# Altium PCB V2_PCB_interplaque_PixhawkPcbDoc.PcbDoc
Units mm, origin at the board's own origin, x right, y up, seen from the top; angles counter-clockwise.
Board outline 48 x 28.5 mm, 2 copper layers (Top Layer, Bottom Layer); 16 components, 46 nets, 128 pads, 46 vias.
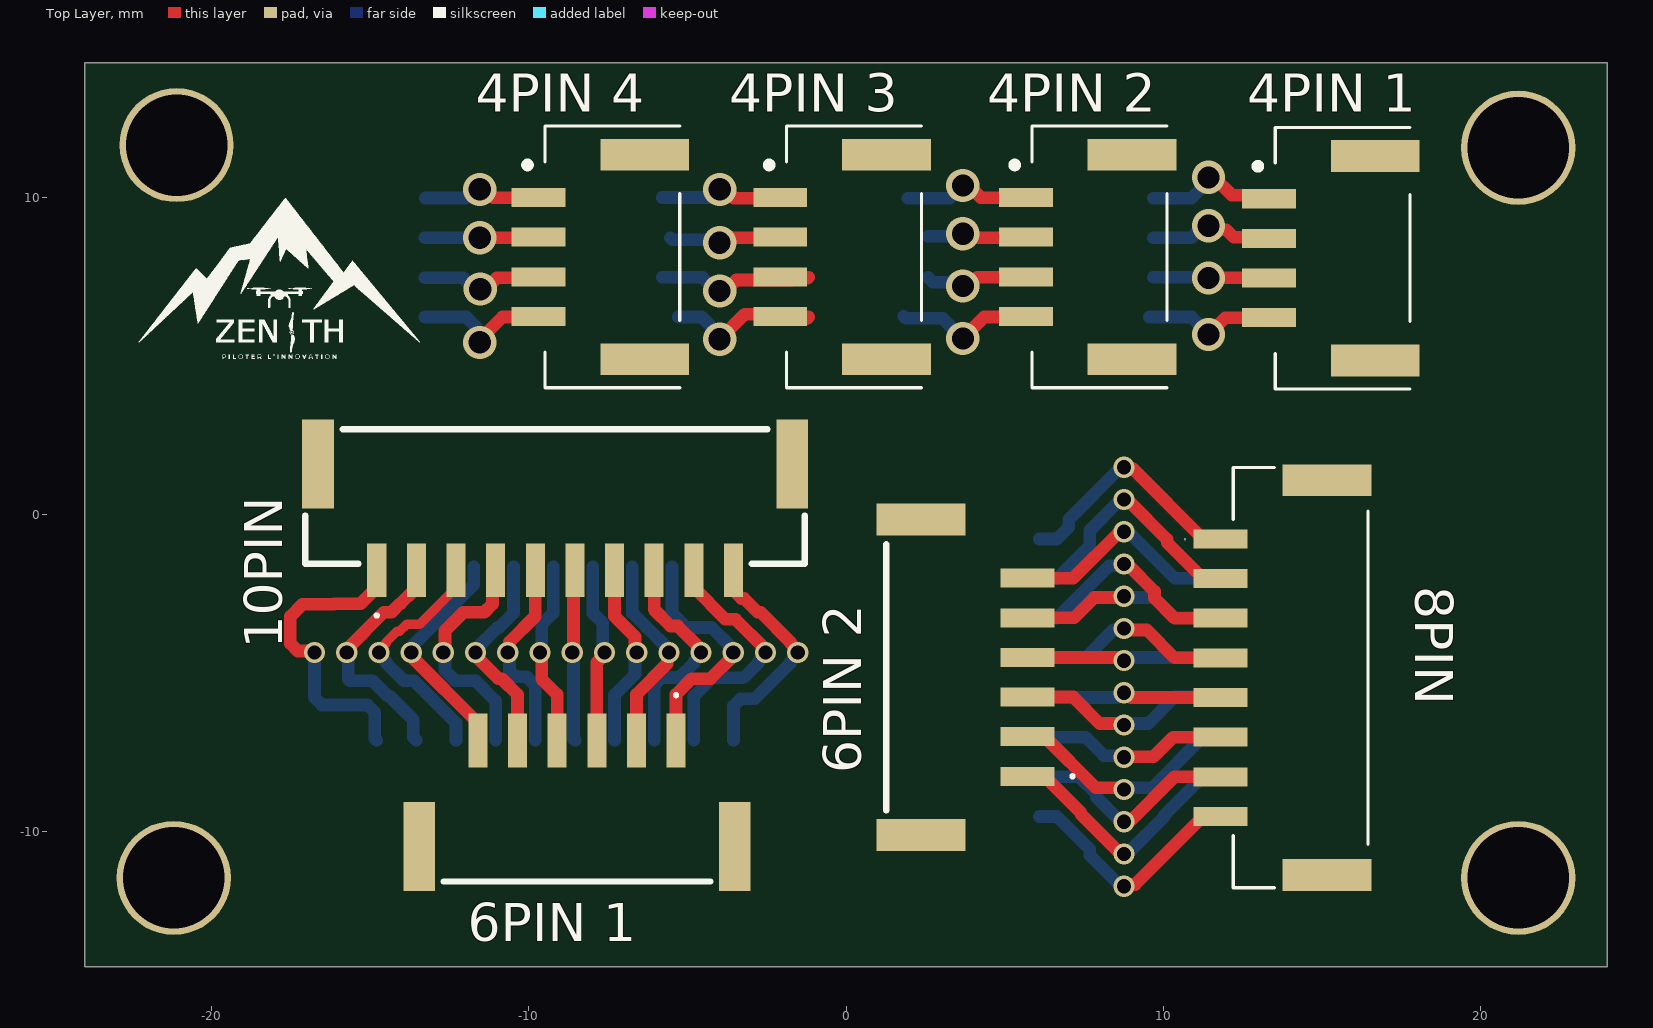
[diagram p0: Top Layer view]
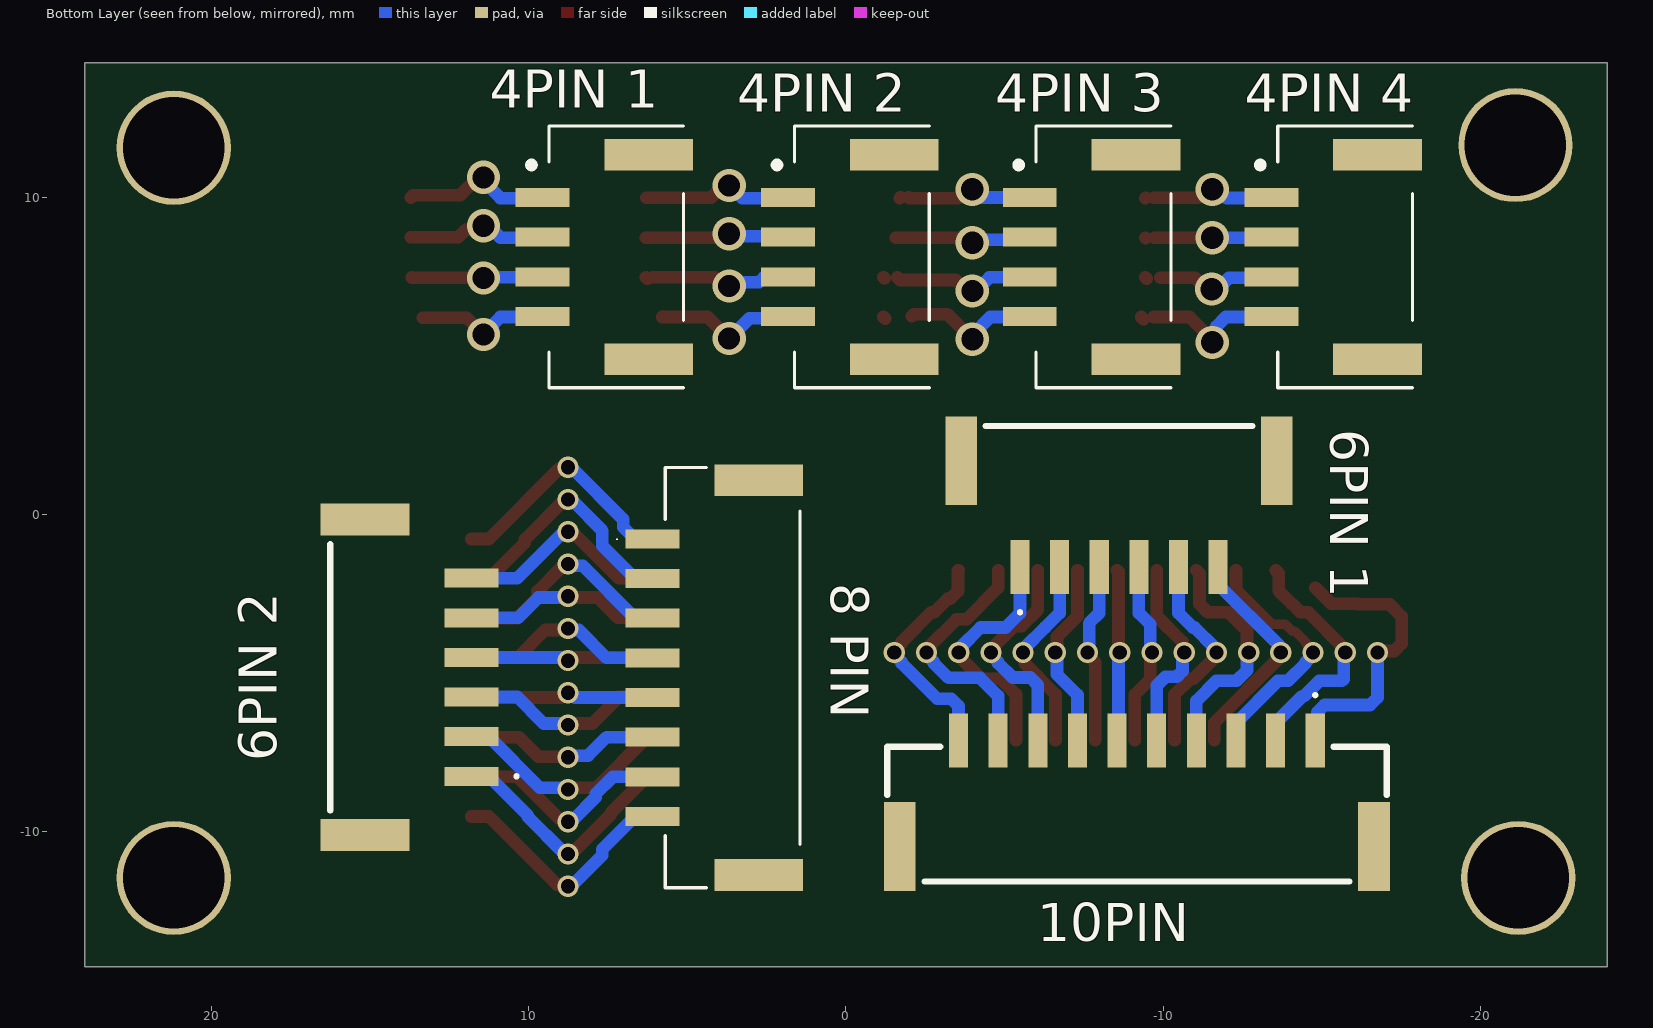
[diagram p1: Bottom Layer view, seen from below]
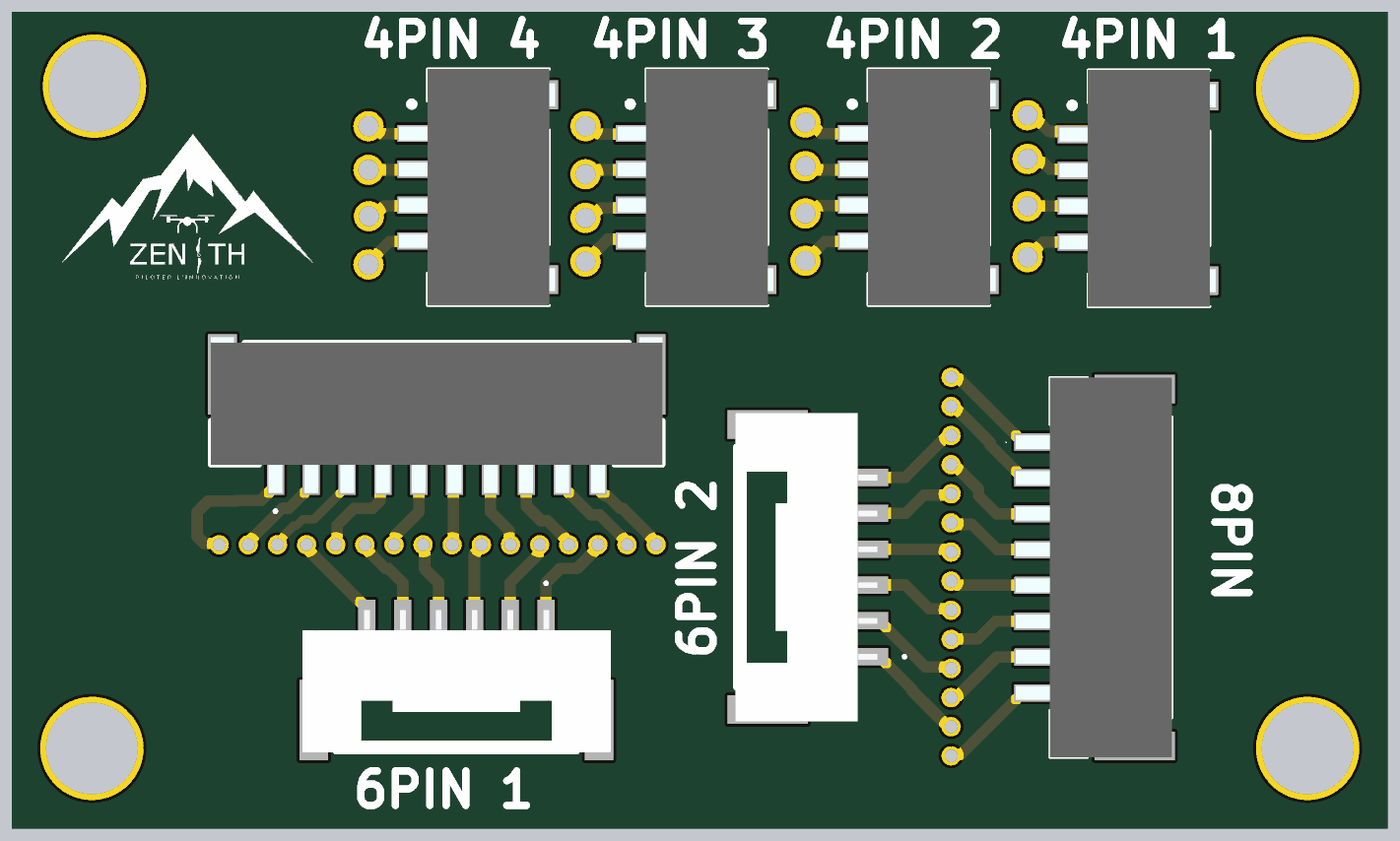
[diagram p2: 3D render of the assembled board from above, using the file's embedded part models]
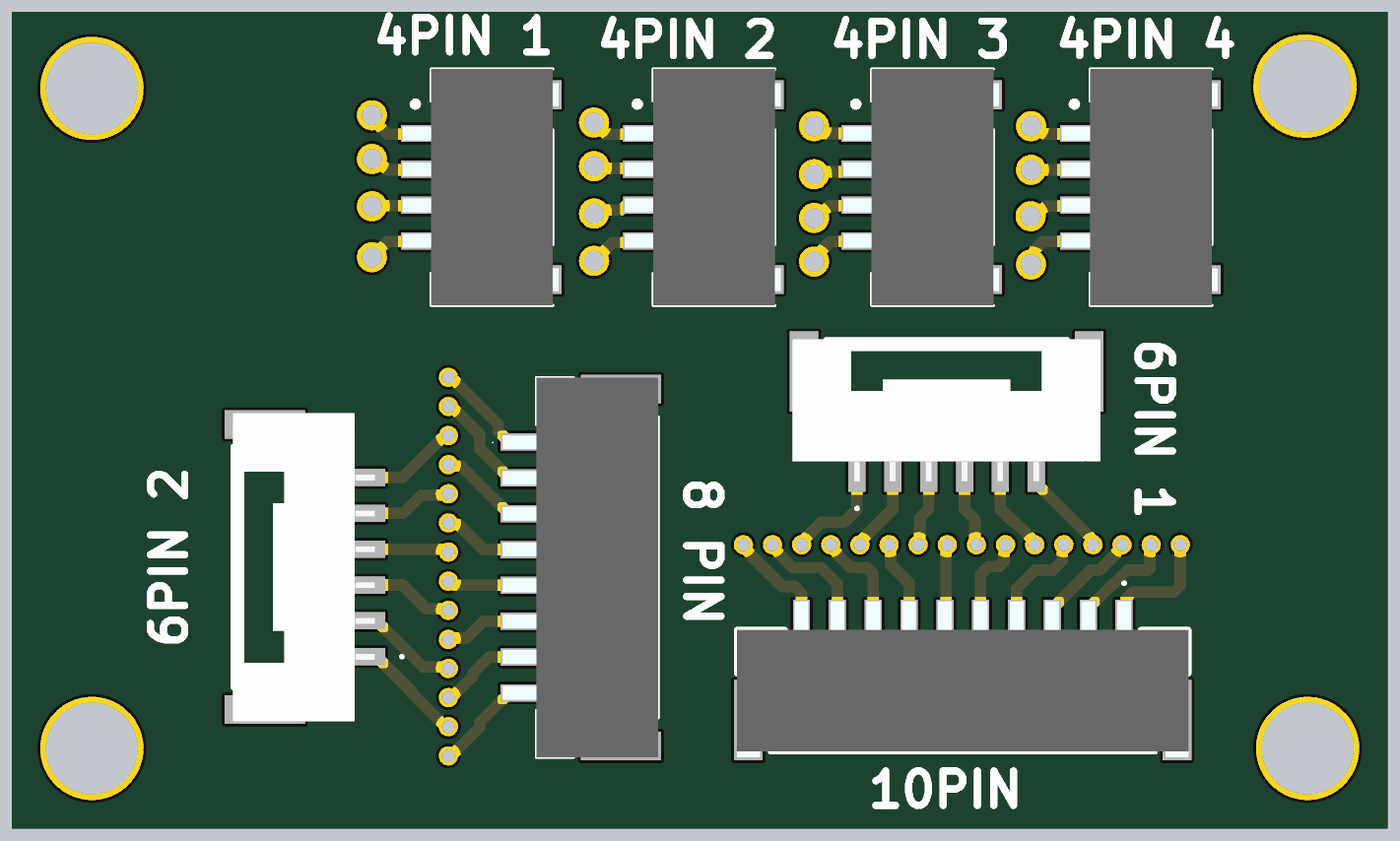
[diagram p3: 3D render of the assembled board from below, using the file's embedded part models]

## Layer stack, top to bottom
Top Solder: solder mask 0.0102, Solder Resist, Dk 3.5
Top Layer: signal copper 0.0356
Dielectric 1: dielectric 0.32, FR-4, Dk 4.8
Bottom Layer: signal copper 0.0356
Bottom Solder: solder mask 0.0102, Solder Resist, Dk 3.5

## Board outline
-24,-14.25 -24,14.25 24,14.25 24,-14.25

## Design rules (kind name [scope] priority, off if disabled: settings)
AssemblyTestpoint [All] p1: testpointundercomponent=TRUE minsize=1.016 maxsize=2.54 preferedsize=1.524 minholesize=0 maxholesize=1.016 preferedholesize=0.813 testpointgrid=0.025 usegrid=TRUE gridoriginx=43.812 gridoriginy=28.283 gridtolerance=0 allowsidetop=TRUE allowsidebottom=TRUE
Clearance [All] p1: gap=0.254 ignorepadtopadclearanceinfootprint=FALSE
FabricationTestpoint [All] p1: side=3 testpointundercomponent=TRUE minsize=1.016 maxsize=2.54 preferedsize=1.524 minholesize=0 maxholesize=1.016 preferedholesize=0.813 testpointgrid=0.025 allowsidetop=TRUE allowsidebottom=TRUE usegrid=TRUE gridoriginx=43.812 gridoriginy=28.283 gridtolerance=0
PolygonConnect [All] p1: connectstyle=Relief reliefconductorwidth=0.254 reliefentries=4 polygonreliefangle="90 Angle" airgapwidth=0.254
RoutingVias [All] p1: holewidth=0.711 width=1.27 viastyle="Through Hole" minholewidth=0.711 minwidth=1.27 maxholewidth=0.711 maxwidth=1.27 useviatemplates=TRUE
SolderMaskExpansion [All] p1: expansion=0.102 istentingtop=FALSE
Width [All] p1: maxlimit=0.5 minlimit=0.3 preferedwidth=0.4
28 further rules are at their usual default settings.

## Classes and differential pairs
component class V2_PCB_interplaque: "4PIN 1" "4PIN 2" "4PIN 3" "4PIN 4" "6PIN 1" "6PIN 2" "8 PIN" 10PIN

## Components (designator, comment, footprint, x,y, rotation, side; value= is the part's Value field where it differs from the comment)
"4PIN 1" "BM04B-GHS-TBT_LF__SN__N_" BM04BGHSTBTLFSNN 7.62,8.132 r90 top (schematic designator "4PIN 1 T")
"4PIN 1" "BM04B-GHS-TBT_LF__SN__N_" BM04BGHSTBTLFSNN -0.124,8.132 r90 bottom (schematic designator "4PIN 1 B")
"4PIN 2" "BM04B-GHS-TBT_LF__SN__N_" BM04BGHSTBTLFSNN 15.288,8.092 r90 top (schematic designator "4PIN 2 T")
"4PIN 2" "BM04B-GHS-TBT_LF__SN__N_" BM04BGHSTBTLFSNN 7.62,8.132 r90 bottom (schematic designator "4PIN 2 B")
"4PIN 3" "BM04B-GHS-TBT_LF__SN__N_" BM04BGHSTBTLFSNN -0.124,8.132 r90 top (schematic designator "4PIN 3 T")
"4PIN 3" "BM04B-GHS-TBT_LF__SN__N_" BM04BGHSTBTLFSNN -7.744,8.132 r90 bottom (schematic designator "4PIN 3 B")
"4PIN 4" "BM04B-GHS-TBT_LF__SN__N_" BM04BGHSTBTLFSNN -7.744,8.132 r90 top (schematic designator "4PIN 4 T")
"4PIN 4" "BM04B-GHS-TBT_LF__SN__N_" BM04BGHSTBTLFSNN -15.364,8.132 r90 bottom (schematic designator "4PIN 4 B")
"6PIN 1" "BM06B-GHS-TBT_LF__SN_" BM06BGHSTBTLFSN -8.484,-9.336 r0 top (schematic designator "6PIN 1 T")
"6PIN 1" "BM06B-GHS-TBT_LF__SN_" BM06BGHSTBTLFSN -8.611,0.577 r0 bottom (schematic designator "6PIN 1 B")
"6PIN 2" "BM06B-GHS-TBT_LF__SN_" BM06BGHSTBTLFSN 3.493,-5.123 r270 top (schematic designator "6PIN 2 T")
"6PIN 2" "BM06B-GHS-TBT_LF__SN_" BM06BGHSTBTLFSN 14.039,-5.123 r270 bottom (schematic designator "6PIN 2 B")
"8 PIN" "BM08B-GHS-TBT_LF__SN__N_" BM08BGHSTBTLFSNN 4.343,-5.136 r90 bottom (schematic designator "8PIN 1 B")
8PIN "BM08B-GHS-TBT_LF__SN__N_" BM08BGHSTBTLFSNN 13.57,-5.136 r90 top (schematic designator "8PIN 1 T")
10PIN "BM10B-GHS-TBT_LF__SN_" BM10BGHSTBTLFSN -9.173,0.577 r180 top (schematic designator "10PIN T")
10PIN "BM10B-GHS-TBT_LF__SN_" BM10BGHSTBTLFSN -9.173,-9.436 r180 bottom (schematic designator "10PIN B")

## Footprints (in the part's own frame and the unit in brackets; to place one, negate y for a bottom-side part, rotate by r counter-clockwise, add the part's x,y. Pads: shape width x height; smd on the part's side, far side on the other; paste and mask are expansions set on the pad)
BM04BGHSTBTLFSNN [mm]
  rect 0.6x1.7 smd: 1(1.875,1.95) 2(0.625,1.95) 3(-0.625,1.95) 4(-1.875,1.95)
  rect 1x2.8 smd: MP1(3.225,-1.4) MP2(-3.225,-1.4)
  silkscreen extent -4.13,-2.5 4.13,2.4, body extent -4.13,-2.7 4.13,2.74, height 4.15
BM06BGHSTBTLFSN [mm]
  rect 0.6x1.7 smd: 1(3.125,2.225) 2(1.875,2.225) 3(0.625,2.225) 4(-0.625,2.225) 5(-1.875,2.225) 6(-3.125,2.225)
  rect 1x2.8 smd: MP1(4.975,-1.125) MP2(-4.975,-1.125)
  silkscreen extent -4.2,-2.22 4.2,3.7, body extent -5.37,-2.24 5.38,2.71, height 4.21
BM08BGHSTBTLFSNN [mm]
  rect 0.6x1.7 smd: 1(4.375,1.756) 2(3.125,1.756) 3(1.875,1.756) 4(0.625,1.756) 5(-0.625,1.756) 6(-1.875,1.756) 7(-3.125,1.756) 8(-4.375,1.756)
  rect 1x2.8 smd: MP1(-6.225,-1.594) MP2(6.225,-1.594)
  silkscreen extent -6.63,-2.89 6.63,2.89, body extent -6.63,-2.89 6.63,2.55, height 8.1
BM10BGHSTBTLFSN [mm]
  rect 0.6x1.7 smd: 1(5.625,2.325) 2(4.375,2.325) 3(3.125,2.325) 4(1.875,2.325) 5(0.625,2.325) 6(-0.625,2.325) 7(-1.875,2.325) 8(-3.125,2.325) 9(-4.375,2.325) 10(-5.625,2.325)
  rect 1x2.8 smd: MP1(-7.475,-1.025) MP2(7.475,-1.025)
  silkscreen extent -7.88,-2.12 7.88,3.8, body extent -7.88,-2.32 7.88,3.12, height 4.15

## Part data
"4PIN 1" "4PIN 1" "4PIN 2" "4PIN 2" "4PIN 3" "4PIN 3" "4PIN 4" "4PIN 4": "Connector", Arrow Part Number=BM04B-GHS-TBT(LF)(SN)(N), Manufacturer_Name="JST (JAPAN SOLDERLESS TERMINALS)", Mouser Part Number=N/A, Arrow Price/Stock=https://www.arrow.com/en/products/bm04b-ghs-tbt-lf-sn-n/jst-manufacturing?region=europe, Datasheet Link=http://www.jst-mfg.com/product/pdf/eng/eGH.pdf, Height=4.05mm, Manufacturer_Part_Number=BM04B-GHS-TBT(LF)(SN)(N), Mouser Price/Stock=https://www.mouser.co.uk/ProductDetail/JST-Commercial/BM04B-GHS-TBTLFSNN?qs=QpmGXVUTftGHKxacCgPJ1g%3D%3D
"6PIN 1" "6PIN 1" "6PIN 2" "6PIN 2": "Connector", Manufacturer_Name="JST (JAPAN SOLDERLESS TERMINALS)", Manufacturer_Part_Number=BM06B-GHS-TBT(LF)(SN), Mouser Part Number=306-BM06BGHSTBTLFSNN, Datasheet Link=https://datasheet.lcsc.com/szlcsc/2004111131_JST-Sales-America-BM06B-GHS-TBT-LF-SN_C495534.pdf, Height=4.05mm, Mouser Price/Stock=https://www.mouser.co.uk/ProductDetail/JST-Commercial/BM06B-GHS-TBTLFSN?qs=cdbOS8ANM9CObKjnhD04mw%3D%3D
"8 PIN" 8PIN: "Connector", Arrow Part Number=BM08B-GHS-TBT(LF)(SN)(N), Manufacturer_Name="JST (JAPAN SOLDERLESS TERMINALS)", Arrow Price/Stock=https://www.arrow.com/en/products/bm08b-ghs-tbt-lf-sn-n/jst-manufacturing, Datasheet Link=http://www.jst-mfg.com/product/pdf/eng/eGH.pdf, Height=8mm, Manufacturer_Part_Number=BM08B-GHS-TBT(LF)(SN)(N)
10PIN 10PIN: "Connector", Manufacturer_Name="JST (JAPAN SOLDERLESS TERMINALS)", Manufacturer_Part_Number=BM10B-GHS-TBT(LF)(SN), Mouser Part Number=306-BM10BGHSTBTLFSNN, Datasheet Link=https://www.jst-mfg.com/product/pdf/eng/eGH.pdf, Height=4.05mm, Mouser Price/Stock=https://www.mouser.co.uk/ProductDetail/JST-Commercial/BM10B-GHS-TBTLFSN?qs=cdbOS8ANM9DbOgMfc5J99A%3D%3D

## Free pads (board coordinates)
  round 3.6 hole 3.2: MTH1(-21.11,11.658) MTH2(-21.2,-11.45) MTH3(21.2,-11.45) MTH4(21.2,11.577)

## Via types
v1: diameter 0.67, hole 0.45, Top Layer to Bottom Layer, 30 vias
v2: diameter 1.05, hole 0.7, Top Layer to Bottom Layer, 11 vias
v3: diameter 1.05, hole 0.711, Top Layer to Bottom Layer, 5 vias

## Nets (pads, with @x,y where several pads share a name; then routed paths per layer and width w, separated by ;. In a path a pad name is that pad's centre, name@x,y a point inside that pad or via, vN(x,y) a via of type N, cw(c..) or ccw(c..) an arc to the next point about the centre after c; other vN are vias at no path point)
"Net4PIN 1 B_1": "4PIN 1.1" | length 4.7
  Top Layer w0.4: v2(3.686,10.388) 3.862,10.388 4.253,9.997 6.295,9.997
  Bottom Layer w0.4: 1.953,9.987 3.276,9.987 3.677,10.388 v2(3.686,10.388)
"Net4PIN 1 B_2": "4PIN 1.2" | length 3.8
  Top Layer w0.4: v2(3.686,8.864) 3.862,8.864 3.989,8.737 6.305,8.737
  Bottom Layer w0.4: 2.588,8.786 3.608,8.786 v2(3.686,8.864)
"Net4PIN 1 B_3": "4PIN 1.3" | length 3.8
  Top Layer w0.4: v2(3.686,7.213) 3.862,7.213 4.136,7.487 6.09,7.487 ; 6.261,7.443 6.305,7.487
  Bottom Layer w0.4: 2.588,7.487 2.738,7.337 3.562,7.337 v2(3.686,7.213)
"Net4PIN 1 B_4": "4PIN 1.4" | length 4.5
  Top Layer w0.4: v2(3.686,5.562) 4.361,6.237 5.797,6.237
  Bottom Layer w0.4: 1.826,6.257 1.886,6.197 3.051,6.197 v2(3.686,5.562)
"Net4PIN 2 B_1": "4PIN 2.1" | length 4.6
  Top Layer w0.4: v2(11.433,10.642) 11.609,10.642 12.174,10.077 13.649,10.077 13.719,10.007
  Bottom Layer w0.4: 9.697,9.987 10.898,9.987 11.433,10.522 v2(11.433,10.642)
"Net4PIN 2 B_2": "4PIN 2.2" | length 4.3
  Top Layer w0.4: v2(11.433,9.118) 11.557,8.994 11.987,8.994 12.224,8.757 13.719,8.757
  Bottom Layer w0.4: 9.697,8.737 10.898,8.737 11.279,9.118 v2(11.433,9.118)
"Net4PIN 2 B_3": "4PIN 2.3" | length 4
  Top Layer w0.4: v2(11.433,7.467) 11.438,7.472 13.684,7.472 13.699,7.487
  Bottom Layer w0.4: 9.697,7.487 11.413,7.487 v2(11.433,7.467)
"Net4PIN 2 B_4": "4PIN 2.4" | length 4.2
  Top Layer w0.4: v2(11.433,5.689) 11.44,5.689 11.968,6.217 13.338,6.217
  Bottom Layer w0.4: 9.57,6.237 10.898,6.237 11.433,5.702 v2(11.433,5.689)
"Net4PIN 3 B_1": "4PIN 3.1" | length 4.1
  Top Layer w0.4: v3(-3.983,10.261) -3.807,10.261 -3.533,9.987 -2.001,9.987 -1.974,10.014 ; -1.72,10.014 -1.693,9.987
  Bottom Layer w0.4: -5.794,10.007 -4.237,10.007 v3(-3.983,10.261)
"Net4PIN 3 B_2": "4PIN 3.2" | length 4.1
  Top Layer w0.4: v2(-3.986,8.582) -3.81,8.582 -3.655,8.737 -1.566,8.737
  Bottom Layer w0.4: -5.54,8.737 -5.473,8.67 -4.073,8.67 v2(-3.986,8.582)
"Net4PIN 3 B_3": "4PIN 3.3" | length 4.6
  Top Layer w0.4: v2(-3.986,7.058) -3.81,7.058 -3.461,7.407 -1.7,7.407 -1.62,7.487 ; -1.212,7.46 -1.185,7.487
  Bottom Layer w0.4: -5.794,7.487 -4.52,7.487 -4.092,7.058 v2(-3.986,7.058)
"Net4PIN 3 B_4": "4PIN 3.4" | length 4
  Top Layer w0.4: v2(-3.986,5.534) -3.196,6.324 -2.141,6.324 -2.074,6.257 ; -1.239,6.183 -1.185,6.237
  Bottom Layer w0.4: -5.286,6.237 -4.549,6.237 -3.986,5.674 v2(-3.986,5.534)
"Net4PIN 4 B_1": "4PIN 4.1" | length 3.8
  Top Layer w0.4: v3(-11.554,10.261) -11.378,10.261 -11.114,9.997 -9.704,9.997 ; -9.45,9.997 -9.44,9.987
  Bottom Layer w0.4: -13.272,9.992 -11.999,9.992 -11.73,10.261 v3(-11.554,10.261)
"Net4PIN 4 B_2": "4PIN 4.2" | length 3.6
  Top Layer w0.4: v3(-11.554,8.737) -9.728,8.737 ; -9.457,8.72 -9.44,8.737
  Bottom Layer w0.4: -13.277,8.737 v3(-11.554,8.737)
"Net4PIN 4 B_3": "4PIN 4.3" | length 3.7
  Top Layer w0.4: v3(-11.538,7.119) -11.362,7.119 -11.004,7.477 -9.919,7.477 ; -9.484,7.443 -9.44,7.487
  Bottom Layer w0.4: -13.287,7.477 -12.073,7.477 -11.714,7.119 v3(-11.538,7.119)
"Net4PIN 4 B_4": "4PIN 4.4" | length 4.6
  Top Layer w0.4: v3(-11.554,5.435) -11.554,5.513 -10.83,6.237 -9.709,6.237 ; -9.384,6.166 -9.313,6.237
  Bottom Layer w0.4: -13.277,6.237 -11.977,6.237 -11.678,5.939 -11.678,5.559 v3(-11.554,5.435)
"Net6PIN 1 B_1": "6PIN 1.1" | length 7.8
  Top Layer w0.4: -5.359,-7.111 -5.359,-5.661 -4.864,-5.166 -4.275,-5.166 -3.605,-4.495 -3.605,-4.396 v1(-3.553,-4.344)
  Bottom Layer w0.4: -5.486,-1.648 -5.486,-3.098 -5.029,-3.555 -4.242,-3.555 -3.605,-4.192 -3.605,-4.292 v1(-3.553,-4.344)
"Net6PIN 1 B_2": "6PIN 1.2" | length 6.4
  Top Layer w0.4: -6.609,-7.111 -6.609,-5.661 -5.637,-4.689 -5.637,-4.396 v1(-5.585,-4.344)
  Bottom Layer w0.4: -6.736,-1.648 -6.736,-3.098 -6.279,-3.555 -6.274,-3.555 -5.637,-4.192 -5.637,-4.292 v1(-5.585,-4.344)
"Net6PIN 1 B_3": "6PIN 1.3" | length 5.7
  Top Layer w0.4: -7.859,-7.111 -7.859,-4.659 -7.617,-4.417 v1(-7.617,-4.344)
  Bottom Layer w0.4: -7.986,-1.648 -7.986,-3.1 -7.669,-3.417 -7.669,-4.292 v1(-7.617,-4.344)
"Net6PIN 1 B_4": "6PIN 1.4" | length 5.9
  Top Layer w0.4: v1(-9.649,-4.344) -9.597,-4.396 -9.597,-5.173 -9.109,-5.661 -9.109,-7.111
  Bottom Layer w0.4: v1(-9.649,-4.344) -9.597,-4.292 -9.597,-3.459 -9.236,-3.098 -9.236,-1.648
"Net6PIN 1 B_5": "6PIN 1.5" | length 6.6
  Top Layer w0.4: v1(-11.681,-4.344) -11.629,-4.396 -11.629,-4.495 -10.956,-5.168 -10.857,-5.168 -10.359,-5.666 -10.359,-7.111
  Bottom Layer w0.4: v1(-11.681,-4.344) -11.629,-4.292 -11.629,-4.192 -10.992,-3.555 -10.943,-3.555 -10.486,-3.098 -10.486,-1.648
"Net6PIN 1 B_6": "6PIN 1.6" | length 7.2
  Top Layer w0.4: v1(-13.713,-4.344) -13.661,-4.396 -13.661,-4.509 -11.609,-6.561 -11.609,-7.111
  Bottom Layer w0.4: v1(-13.713,-4.344) -13.661,-4.292 -13.661,-4.123 -11.736,-2.198 -11.736,-1.648
"Net6PIN 2 B_1": "6PIN 2.1" | length 8.2
  Top Layer w0.4: 5.718,-8.248 6.268,-8.248 7.404,-9.384 7.404,-9.431 8.615,-10.642 8.714,-10.642 v1(8.766,-10.694)
  Bottom Layer w0.4: v1(8.766,-10.694) 8.818,-10.642 8.917,-10.642 10.041,-9.519 10.041,-9.471 11.264,-8.248 11.814,-8.248
"Net6PIN 2 B_2": "6PIN 2.2" | length 7.5
  Top Layer w0.4: 5.718,-6.998 6.268,-6.998 7.88,-8.61 8.714,-8.61 v1(8.766,-8.662)
  Bottom Layer w0.4: v1(8.766,-8.662) 8.818,-8.61 9.652,-8.61 11.264,-6.998 11.814,-6.998
"Net6PIN 2 B_3": "6PIN 2.3" | length 6.8
  Top Layer w0.4: 5.718,-5.748 7.168,-5.748 7.998,-6.578 8.714,-6.578 v1(8.766,-6.63)
  Bottom Layer w0.4: v1(8.766,-6.63) 8.818,-6.578 9.534,-6.578 10.364,-5.748 11.814,-5.748
"Net6PIN 2 B_4": "6PIN 2.4" | length 6.2
  Top Layer w0.4: 5.718,-4.498 8.593,-4.498 8.693,-4.598 v1(8.766,-4.598)
  Bottom Layer w0.4: v1(8.766,-4.598) 8.839,-4.598 8.939,-4.498 11.814,-4.498
"Net6PIN 2 B_5": "6PIN 2.5" | length 6.7
  Top Layer w0.4: 5.718,-3.248 7.189,-3.248 7.831,-2.606 8.726,-2.606 v1(8.766,-2.566)
  Bottom Layer w0.4: v1(8.766,-2.566) 8.806,-2.606 9.701,-2.606 10.343,-3.248 11.814,-3.248
"Net6PIN 2 B_6": "6PIN 2.6" | length 7.3
  Top Layer w0.4: 5.718,-1.998 7.168,-1.998 8.58,-0.586 8.714,-0.586 v1(8.766,-0.534)
  Bottom Layer w0.4: v1(8.766,-0.534) 8.818,-0.586 8.952,-0.586 10.364,-1.998 11.814,-1.998
"Net8PIN 1 B_1": 8PIN.1 "8 PIN.1" | length 7.7
  Top Layer w0.4: v1(8.766,1.498) 8.818,1.446 9.057,1.446 11.264,-0.761 8PIN.1
  Bottom Layer w0.4: 6.099,-0.761 6.649,-0.761 7.028,-0.382 7.028,-0.14 8.615,1.446 8.714,1.446 v1(8.766,1.498)
"Net8PIN 1 B_2": 8PIN.2 "8 PIN.2" | length 8.1
  Top Layer w0.4: v1(8.766,0.482) 8.818,0.43 8.917,0.43 10.128,-0.781 10.128,-0.875 11.264,-2.011 8PIN.2
  Bottom Layer w0.4: 6.099,-2.011 6.649,-2.011 7.682,-0.978 7.682,-0.502 8.615,0.43 8.714,0.43 v1(8.766,0.482)
"Net8PIN 1 B_3": 8PIN.3 "8 PIN.3" | length 7.3
  Top Layer w0.4: v1(8.766,-1.55) 8.818,-1.602 8.917,-1.602 9.728,-2.413 9.728,-2.625 10.364,-3.261 8PIN.3
  Bottom Layer w0.4: 6.099,-3.261 6.649,-3.261 8.308,-1.602 8.714,-1.602 v1(8.766,-1.55)
"Net8PIN 1 B_4": 8PIN.4 "8 PIN.4" | length 6.5
  Top Layer w0.4: v1(8.766,-3.582) 8.818,-3.634 9.487,-3.634 10.364,-4.511 8PIN.4
  Bottom Layer w0.4: 6.099,-4.511 7.549,-4.511 8.426,-3.634 8.714,-3.634 v1(8.766,-3.582)
"Net8PIN 1 B_5": 8PIN.5 "8 PIN.5" | length 5.8
  Top Layer w0.4: v1(8.766,-5.614) 8.839,-5.614 8.986,-5.761 8PIN.5
  Bottom Layer w0.4: 6.099,-5.761 8.546,-5.761 8.693,-5.614 v1(8.766,-5.614)
"Net8PIN 1 B_6": 8PIN.6 "8 PIN.6" | length 6.2
  Top Layer w0.4: v1(8.766,-7.646) 8.783,-7.629 9.701,-7.629 10.319,-7.011 8PIN.6
  Bottom Layer w0.4: 6.099,-7.011 7.549,-7.011 8.132,-7.594 8.714,-7.594 v1(8.766,-7.646)
"Net8PIN 1 B_7": 8PIN.7 "8 PIN.7" | length 6.9
  Top Layer w0.4: v1(8.766,-9.678) 8.818,-9.626 8.999,-9.626 10.364,-8.261 8PIN.7
  Bottom Layer w0.4: 6.099,-8.261 7.349,-8.261 7.894,-8.806 7.894,-8.906 8.615,-9.626 8.714,-9.626 v1(8.766,-9.678)
"Net8PIN 1 B_8": 8PIN.8 "8 PIN.8" | length 7.6
  Top Layer w0.4: v1(8.766,-11.71) 8.818,-11.658 9.117,-11.658 11.264,-9.511 8PIN.8
  Bottom Layer w0.4: 6.099,-9.511 6.649,-9.511 7.682,-10.544 7.682,-10.726 8.615,-11.658 8.714,-11.658 v1(8.766,-11.71)
"Net10PIN B_1": 10PIN.1 | length 9.3
  Top Layer w0.4: v1(-16.761,-4.344) -16.813,-4.292 -17.289,-4.292 -17.523,-4.058 -17.523,-3.201 -17.142,-2.82 -16.162,-2.82 -16.143,-2.801 -15.301,-2.801 10PIN.1@-14.798,-2.298
  Bottom Layer w0.4: v1(-16.761,-4.344) -16.761,-5.761 -16.527,-5.995 -15.09,-5.995 -14.856,-6.229 -14.856,-7.053 10PIN.1@-14.798,-7.111
"Net10PIN B_2": 10PIN.2 | length 7.8
  Top Layer w0.4: v1(-15.745,-4.344) -15.693,-4.292 -15.693,-4.192 -14.569,-3.069 -14.327,-3.069 -14.059,-2.801 -14.051,-2.801 -13.648,-2.398 -13.648,-1.848 10PIN.2@-13.548,-1.748
  Bottom Layer w0.4: v1(-15.745,-4.344) -15.693,-4.396 -15.693,-5.177 -15.638,-5.233 -14.927,-5.233 -14.439,-5.721 -14.388,-5.721 -13.648,-6.461 -13.648,-7.011 10PIN.2@-13.548,-7.111
"Net10PIN B_3": 10PIN.3 | length 7.8
  Top Layer w0.3: v1@-14.729,-4.271 -14.502,-4.044 -14.502,-4.017 -14.157,-3.673 -14.076,-3.673 -13.859,-3.455 -13.455,-3.455 10PIN.3@-12.298,-2.298
  Top Layer w0.4: v1(-14.729,-4.344) v1@-14.729,-4.271 ; 10PIN.3@-12.298,-2.298 10PIN.3@-12.298,-1.748
  Bottom Layer w0.4: v1(-14.729,-4.344) -14.729,-4.417 -14.502,-4.644 -14.502,-4.671 -13.94,-5.233 -13.626,-5.233 -12.298,-6.561 10PIN.3@-12.298,-7.111
"Net10PIN B_4": 10PIN.4 | length 7.5
  Top Layer w0.4: v1(-12.697,-4.344) -12.645,-4.292 -12.645,-3.657 -12.062,-3.074 -11.407,-3.074 -11.148,-2.815 -11.148,-1.848 10PIN.4@-11.048,-1.748
  Bottom Layer w0.4: v1(-12.697,-4.344) -12.645,-4.396 -12.645,-4.904 -12.316,-5.233 -11.681,-5.233 -11.048,-5.866 10PIN.4@-11.048,-7.111
"Net10PIN B_5": 10PIN.5 | length 6.3
  Top Layer w0.4: v1(-10.665,-4.344) -10.613,-4.292 -10.613,-4.013 -9.798,-3.198 10PIN.5@-9.798,-1.748
  Bottom Layer w0.4: v1(-10.665,-4.344) -10.613,-4.396 -10.613,-4.923 -10.431,-5.106 -10.074,-5.106 -9.798,-5.382 10PIN.5@-9.798,-7.111
"Net10PIN B_6": 10PIN.6 | length 5.4
  Top Layer w0.4: v1(-8.633,-4.344) -8.591,-4.301 -8.591,-1.79 10PIN.6@-8.548,-1.748
  Bottom Layer w0.4: v1(-8.633,-4.344) -8.591,-4.386 -8.591,-7.068 10PIN.6@-8.548,-7.111
"Net10PIN B_7": 10PIN.7 | length 5.9
  Top Layer w0.4: 10PIN.7@-7.298,-1.748 -7.298,-3.198 -6.653,-3.843 -6.653,-4.292 v1(-6.601,-4.344)
  Bottom Layer w0.4: 10PIN.7@-7.298,-7.111 -7.298,-5.676 -6.653,-5.031 -6.653,-4.396 v1(-6.601,-4.344)
"Net10PIN B_8": 10PIN.8 | length 7
  Top Layer w0.4: 10PIN.8@-6.048,-1.748 -6.048,-2.992 -5.535,-3.505 -5.309,-3.505 -4.621,-4.192 -4.621,-4.292 v1(-4.569,-4.344)
  Bottom Layer w0.4: 10PIN.8@-6.048,-7.111 -6.048,-5.367 -5.814,-5.133 -5.258,-5.133 -4.796,-4.671 -4.796,-4.644 -4.569,-4.417 v1(-4.569,-4.344)
"Net10PIN B_9": 10PIN.9 | length 8
  Top Layer w0.4: 10PIN.9@-4.798,-1.748 -4.798,-2.298 -3.801,-3.295 -3.486,-3.295 -2.589,-4.192 -2.589,-4.292 v1(-2.537,-4.344)
  Bottom Layer w0.4: 10PIN.9@-4.798,-7.111 -4.798,-5.716 -4.224,-5.142 -3.236,-5.142 -2.764,-4.671 -2.764,-4.644 -2.537,-4.417 v1(-2.537,-4.344)
"Net10PIN B_10": 10PIN.10 | length 7.4
  Top Layer w0.4: 10PIN.10@-3.548,-1.748 -3.53,-1.766 -3.53,-2.407 -3.296,-2.641 -3.215,-2.641 -2.787,-3.07 -2.696,-3.07 -1.748,-4.017 -1.748,-4.044 -1.521,-4.271 v1(-1.521,-4.344)
  Bottom Layer w0.4: 10PIN.10@-3.548,-7.111 -3.548,-6.031 -3.314,-5.796 -2.874,-5.796 -1.748,-4.671 -1.748,-4.644 -1.521,-4.417 v1(-1.521,-4.344)
pads on no net: 8PIN.MP1 8PIN.MP2 10PIN.MP1 10PIN.MP2 "4PIN 1.MP1" "4PIN 1.MP2" "4PIN 2.MP1" "4PIN 2.MP2" "4PIN 3.MP1" "4PIN 3.MP2" "4PIN 4.MP1" "4PIN 4.MP2" "6PIN 1.MP1" "6PIN 1.MP2" "6PIN 2.MP1" "6PIN 2.MP2" "8 PIN.MP1" "8 PIN.MP2"

## Silkscreen, mask and mechanical layers (free items; w line width, h text height)
Top Overlay:
  drawing of 32 lines, arcs and shapes, not listed
Mechanical 1:
  region: -22.312,5.434 -22.305,5.434 -22.305,5.428 -22.312,5.428
  region: -22.305,5.434 -22.305,5.441 -22.299,5.441 -22.299,5.434
  region: -13.429,5.441 -13.429,5.434 -13.435,5.434 -13.435,5.441
  region: 19.278,9.165 19.278,9.157 19.27,9.157 19.27,9.165
  region: 19.278,9.157 19.286,9.157 19.286,9.149 19.278,9.149
  region: -19.675,2.774 -19.675,2.772 -19.678,2.772 -19.678,2.774